# EAGLE board Keychain_Tape (EAGLE 9.5.2)
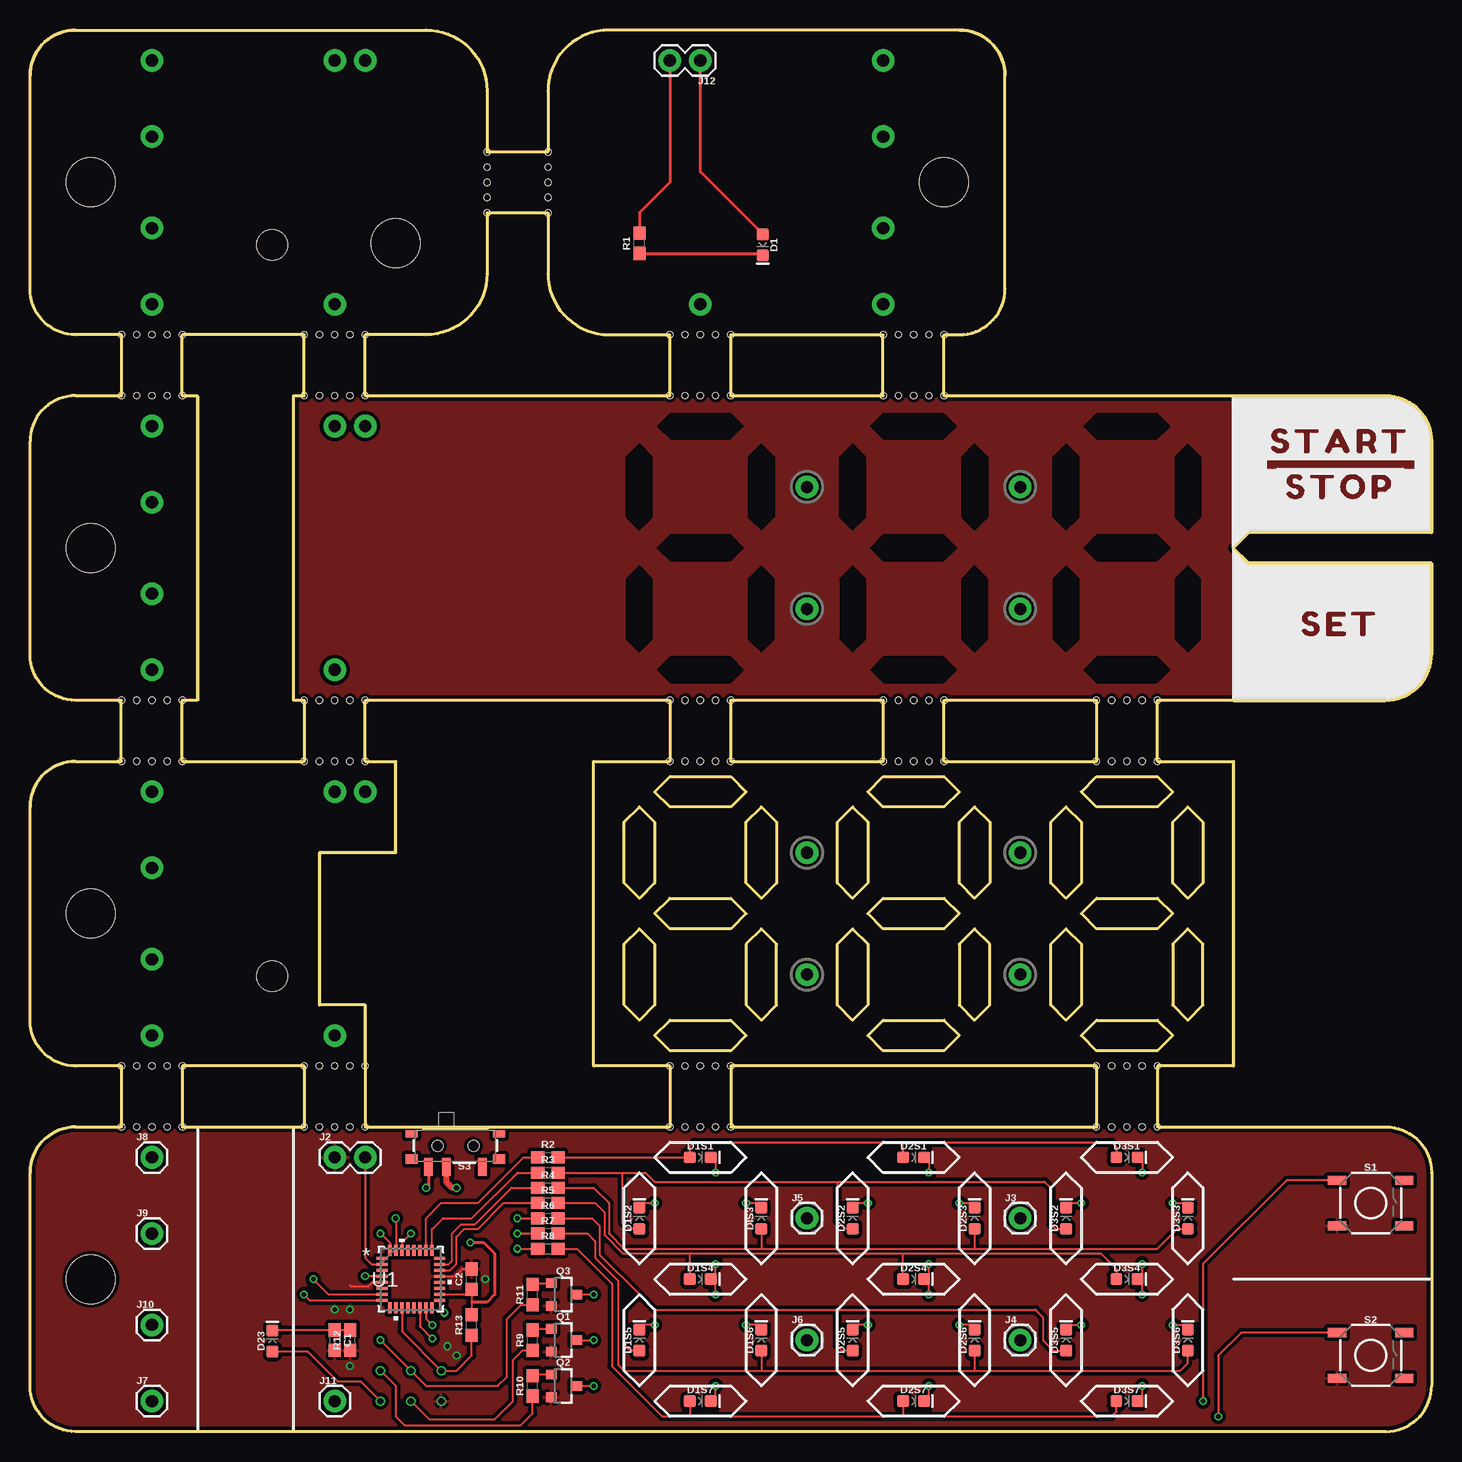
[diagram p0: board, top side]
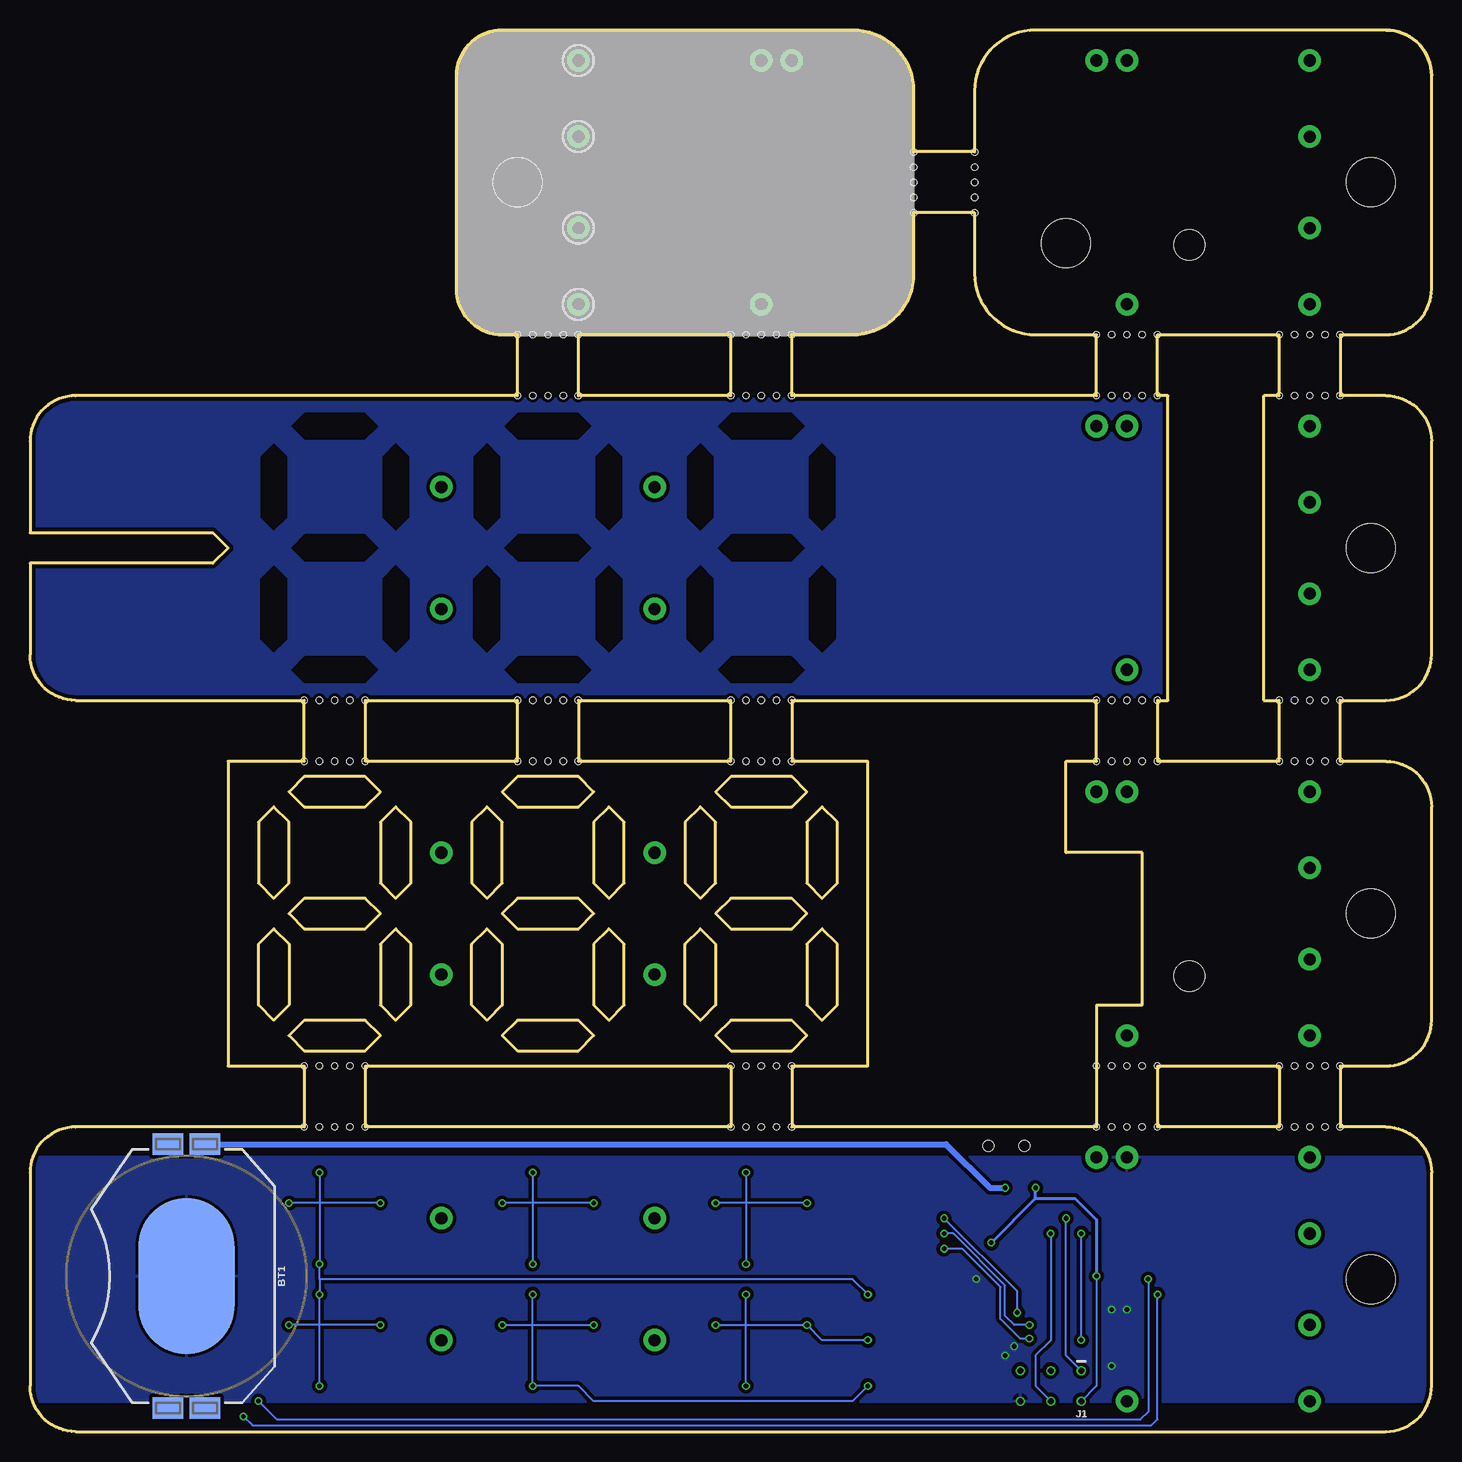
[diagram p1: board, bottom side, seen from below]

Size 116.84 x 116.84 mm. Coordinates in mm from the lower left corner, seen from the top.
Outline: 3.81,116.84 arc90 0,113.03
Outline: 3.81,91.44 arc-90 0,95.25
Outline: 0,113.03 arc-90 3.81,116.84
Outline: 3.81,116.84 33.02,116.84 arc-90 38.1,111.76 38.1,106.68 43.18,106.68 43.18,111.76 arc-90 48.26,116.84 77.47,116.84
Outline: 3.81,91.44 7.62,91.44 7.62,86.36 3.81,86.36 arc90 0,82.55 0,64.77 arc90 3.81,60.96 7.62,60.96 7.62,55.88 3.81,55.88 arc90 0,52.07 0,34.29 arc90 3.81,30.48 7.62,30.48 7.62,25.4 3.81,25.4 arc90 0,21.59 0,3.81 arc90 3.81,0 113.03,0 arc90 116.84,3.81 116.84,21.59 arc90 113.03,25.4 93.98,25.4 93.98,30.48 100.33,30.48 100.33,55.88 93.98,55.88 93.98,60.96 113.03,60.96 arc90 116.84,64.77 116.84,72.39 101.6,72.39 100.33,73.66 101.6,74.93 116.84,74.93 116.84,82.55 arc90 113.03,86.36 76.2,86.36 76.2,91.44 77.47,91.44
Outline: 3.81,91.44 arc-90 0,95.25
Outline: 0,95.25 0,113.03
Outline: 77.47,116.84 arc-90 81.28,113.03
Outline: 77.47,91.44 arc90 81.28,95.25
Outline: 81.28,113.03 arc90 77.47,116.84
Outline: 77.47,91.44 arc90 81.28,95.25
Outline: 81.28,95.25 81.28,113.03
Outline: 12.7,25.4 22.86,25.4 22.86,30.48 12.7,30.48 12.7,25.4
Outline: 27.94,25.4 53.34,25.4 53.34,30.48 46.99,30.48 46.99,55.88 53.34,55.88 53.34,60.96 27.94,60.96 27.94,55.88 30.48,55.88 30.48,48.26 24.13,48.26 24.13,35.56 27.94,35.56 27.94,25.4
Outline: 58.42,25.4 88.9,25.4 88.9,30.48 58.42,30.48 58.42,25.4
Outline: 12.7,55.88 22.86,55.88 22.86,60.96 21.97,60.96 21.97,86.36 22.86,86.36 22.86,91.44 12.7,91.44 12.7,86.36 13.97,86.36 13.97,60.96 12.7,60.96 12.7,55.88
Outline: 58.42,55.88 71.12,55.88 71.12,60.96 58.42,60.96 58.42,55.88
Outline: 76.2,55.88 88.9,55.88 88.9,60.96 76.2,60.96 76.2,55.88
Outline: 52.07,53.34 53.34,54.61 58.42,54.61 59.69,53.34 58.42,52.07 53.34,52.07 52.07,53.34
Outline: 50.8,52.07 52.07,50.8 52.07,45.72 50.8,44.45 49.53,45.72 49.53,50.8 50.8,52.07
Outline: 60.96,52.07 62.23,50.8 62.23,45.72 60.96,44.45 59.69,45.72 59.69,50.8 60.96,52.07
Outline: 52.07,43.18 53.34,44.45 58.42,44.45 59.69,43.18 58.42,41.91 53.34,41.91 52.07,43.18
Outline: 50.8,41.91 52.07,40.64 52.07,35.56 50.8,34.29 49.53,35.56 49.53,40.64 50.8,41.91
Outline: 60.96,41.91 59.69,40.64 59.69,35.56 60.96,34.29 62.23,35.56 62.23,40.64 60.96,41.91
Outline: 52.07,33.02 53.34,34.29 58.42,34.29 59.69,33.02 58.42,31.75 53.34,31.75 52.07,33.02
Outline: 69.85,53.34 71.12,54.61 76.2,54.61 77.47,53.34 76.2,52.07 71.12,52.07 69.85,53.34
Outline: 68.58,52.07 69.85,50.8 69.85,45.72 68.58,44.45 67.31,45.72 67.31,50.8 68.58,52.07
Outline: 78.74,52.07 80.01,50.8 80.01,45.72 78.74,44.45 77.47,45.72 77.47,50.8 78.74,52.07
Outline: 69.85,43.18 71.12,44.45 76.2,44.45 77.47,43.18 76.2,41.91 71.12,41.91 69.85,43.18
Outline: 68.58,41.91 69.85,40.64 69.85,35.56 68.58,34.29 67.31,35.56 67.31,40.64 68.58,41.91
Outline: 78.74,41.91 77.47,40.64 77.47,35.56 78.74,34.29 80.01,35.56 80.01,40.64 78.74,41.91
Outline: 69.85,33.02 71.12,34.29 76.2,34.29 77.47,33.02 76.2,31.75 71.12,31.75 69.85,33.02
Outline: 87.63,53.34 88.9,54.61 93.98,54.61 95.25,53.34 93.98,52.07 88.9,52.07 87.63,53.34
Outline: 86.36,52.07 87.63,50.8 87.63,45.72 86.36,44.45 85.09,45.72 85.09,50.8 86.36,52.07
Outline: 96.52,52.07 97.79,50.8 97.79,45.72 96.52,44.45 95.25,45.72 95.25,50.8 96.52,52.07
Outline: 87.63,43.18 88.9,44.45 93.98,44.45 95.25,43.18 93.98,41.91 88.9,41.91 87.63,43.18
Outline: 86.36,41.91 87.63,40.64 87.63,35.56 86.36,34.29 85.09,35.56 85.09,40.64 86.36,41.91
Outline: 96.52,41.91 95.25,40.64 95.25,35.56 96.52,34.29 97.79,35.56 97.79,40.64 96.52,41.91
Outline: 87.63,33.02 88.9,34.29 93.98,34.29 95.25,33.02 93.98,31.75 88.9,31.75 87.63,33.02
Outline: 27.94,86.36 53.34,86.36 53.34,91.44 48.26,91.44 arc-90 43.18,96.52 43.18,101.6 38.1,101.6 38.1,96.52 arc-90 33.02,91.44 27.94,91.44 27.94,86.36
Outline: 58.42,86.36 71.12,86.36 71.12,91.44 58.42,91.44 58.42,86.36
Copper layers (1*16): Top 0.035mm / dielectric 1.5mm / Bottom 0.035mm
Design rules "SparkFun-2-Layer-Minimum-JLCPCB": minimum track width 5mil, minimum drill 0.3mm, track to track 5mil, track to pad 5mil, pad to pad 5mil, via to via 5mil, smd to smd 5mil, copper to edge 7mil, drill to drill 7mil, minimum pad ring 5mil, minimum via ring 5mil, stop-mask expansion 4mil, vias tented up to drill 25mil, thermal gap 10mil
Holes 4.06 mm at 5.08,12.7 5.08,43.18 5.08,73.66 5.08,104.14 76.2,104.14 30.48,99.06
Holes 2.54 mm at 20.19,37.97 20.19,98.93
Holes 0.51 mm at 10.16,91.44 11.43,91.44 8.89,91.44 7.62,91.44 12.7,91.44 25.4,91.44 26.67,91.44 24.13,91.44 22.86,91.44 27.94,91.44 10.16,86.36 11.43,86.36 8.89,86.36 7.62,86.36 12.7,86.36 25.4,86.36 26.67,86.36 24.13,86.36 22.86,86.36 27.94,86.36 55.88,86.36 57.15,86.36 54.61,86.36 53.34,86.36 58.42,86.36 73.66,86.36 74.93,86.36 72.39,86.36 71.12,86.36 76.2,86.36 55.88,91.44 57.15,91.44 54.61,91.44 53.34,91.44 58.42,91.44 73.66,91.44 74.93,91.44 72.39,91.44 71.12,91.44 76.2,91.44 43.18,104.14 43.18,105.41 43.18,102.87 43.18,101.6 43.18,106.68 38.1,104.14 38.1,105.41 38.1,102.87 38.1,101.6 38.1,106.68 10.16,55.88 11.43,55.88 8.89,55.88 7.62,55.88 12.7,55.88 10.16,60.96 11.43,60.96 8.89,60.96 7.62,60.96 12.7,60.96 25.4,60.96 26.67,60.96 24.13,60.96 22.86,60.96 27.94,60.96 25.4,55.88 26.67,55.88 24.13,55.88 22.86,55.88 27.94,55.88 55.88,60.96 57.15,60.96 54.61,60.96 53.34,60.96 58.42,60.96 73.66,60.96 74.93,60.96 72.39,60.96 71.12,60.96 76.2,60.96 91.44,60.96 92.71,60.96 90.17,60.96 88.9,60.96 93.98,60.96 55.88,55.88 57.15,55.88 54.61,55.88 53.34,55.88 58.42,55.88 73.66,55.88 74.93,55.88 72.39,55.88 71.12,55.88 76.2,55.88 91.44,55.88 92.71,55.88 90.17,55.88 88.9,55.88 93.98,55.88 10.16,25.4 11.43,25.4 8.89,25.4 7.62,25.4 12.7,25.4 10.16,30.48 11.43,30.48 8.89,30.48 7.62,30.48 12.7,30.48 25.4,25.4 26.67,25.4 24.13,25.4 22.86,25.4 27.94,25.4 25.4,30.48 26.67,30.48 24.13,30.48 22.86,30.48 27.94,30.48 55.88,25.4 57.15,25.4 54.61,25.4 53.34,25.4 58.42,25.4 55.88,30.48 57.15,30.48 54.61,30.48 53.34,30.48 58.42,30.48 91.44,25.4 92.71,25.4 90.17,25.4 88.9,25.4 93.98,25.4 91.44,30.48 92.71,30.48 90.17,30.48 88.9,30.48 93.98,30.48

## Footprints (pad centres in the part's own frame; a part is rotated, then mirrored left to right if it is on the bottom)
BATTCON_20MM_4LEGS_OVERPASTE_INNER = smd 1.778 x 2.54: 1 -11,1.55; 3 11,1.55; P$1 -11,-1.55; P$2 11,-1.55 | smd 13 x 8: 2 0,0
0603 = smd 1.1 x 1: 1 -0.85,0; 2 0.85,0
LED-0603 = smd 1 x 1: A -0.877,0; C 0.877,0
2X3_TEST_POINTS = drill 0.508: 1 -2.54,-1.27; 2 -2.54,1.27; 3 0,-1.27; 4 0,1.27; 5 2.54,-1.27; 6 2.54,1.27
1X02 = drill 1.016 pad 1.88: 1 0,0; 2 2.54,0
1X01 = drill 1.016 pad 1.88: 1 0,0
SOT23-3 = smd 0.8 x 0.9: 1 -0.95,-1; 2 0.95,-1; 3 0,1.1
TACTILE_SWITCH_SMD_5.2MM = smd 1.524 x 0.762: 1 -2.794,1.905; 2 2.794,1.905; 3 -2.794,-1.905; 4 2.794,-1.905
SWITCH_SPST_SMD_A = smd 0.7 x 1.5: 1 -2.25,-1.75; 2 -0.75,-1.75; 3 2.25,-1.75 | smd 1 x 0.6: GND1 -3.65,1; GND3 3.65,1 | smd 1 x 0.8: GND2 -3.65,-1.1; GND4 3.65,-1.1 | hole 0.9: -1.5,0; 1.5,0
32M1-A_ATM = smd 0.914 x 0.254: 1 -2.4,1.75; 2 -2.4,1.25; 3 -2.4,0.75; 4 -2.4,0.25; 5 -2.4,-0.25; 6 -2.4,-0.75; 7 -2.4,-1.25; 8 -2.4,-1.75; 17 2.4,-1.75; 18 2.4,-1.25; 19 2.4,-0.75; 20 2.4,-0.25; 21 2.4,0.25; 22 2.4,0.75; 23 2.4,1.25; 24 2.4,1.75 | smd 0.254 x 0.914: 9 -1.75,-2.4; 10 -1.25,-2.4; 11 -0.75,-2.4; 12 -0.25,-2.4; 13 0.25,-2.4; 14 0.75,-2.4; 15 1.25,-2.4; 16 1.75,-2.4; 25 1.75,2.4; 26 1.25,2.4; 27 0.75,2.4; 28 0.25,2.4; 29 -0.25,2.4; 30 -0.75,2.4; 31 -1.25,2.4; 32 -1.75,2.4

## Placement (x,y rotation side)
BT1  [BATTCON_20MM_4LEGS_OVERPASTE_INNER]  103.79,12.96 270 bottom
C1  0.1uF  [0603]  25.4,7.62 270 top
C2  0.1uF  [0603]  36.83,12.7 90 top
D1  IR LED  [LED-0603]  61.09,98.93 270 top
D1S1  [LED-0603]  55.88,22.86 0 top
D1S2  [LED-0603]  50.8,17.78 90 top
D1S4  [LED-0603]  55.88,12.7 0 top
D1S5  [LED-0603]  50.8,7.62 90 top
D1S6  [LED-0603]  60.96,7.62 90 top
D1S7  [LED-0603]  55.88,2.54 0 top
D2S1  [LED-0603]  73.66,22.86 0 top
D2S2  [LED-0603]  68.58,17.78 90 top
D2S3  [LED-0603]  78.74,17.78 90 top
D2S4  [LED-0603]  73.66,12.7 0 top
D2S5  [LED-0603]  68.58,7.62 90 top
D2S6  [LED-0603]  78.74,7.62 90 top
D2S7  [LED-0603]  73.66,2.54 0 top
D3S1  [LED-0603]  91.44,22.86 0 top
D3S2  [LED-0603]  86.36,17.78 90 top
D3S3  [LED-0603]  96.52,17.78 90 top
D3S4  [LED-0603]  91.44,12.7 0 top
D3S5  [LED-0603]  86.36,7.62 90 top
D3S6  [LED-0603]  96.52,7.62 90 top
D3S7  [LED-0603]  91.44,2.54 0 top
D23  IR PHOTOTRANS  [LED-0603]  20.21,7.56 90 top
DIS3  [LED-0603]  60.96,17.78 90 top
FRAME1  FRAME-LETTER  [CREATIVE_COMMONS]  35.6,-12.17 0 top  (outside the outline)
J1  AVR_SPI_PROG_3X2TESTPOINTS  [2X3_TEST_POINTS]  31.75,3.81 180 bottom
J2  [1X02]  25.4,22.86 0 top
J3  [1X01]  82.55,17.78 0 top
J4  [1X01]  82.55,7.62 0 top
J5  [1X01]  64.77,17.78 0 top
J6  [1X01]  64.77,7.62 0 top
J7  [1X01]  10.16,2.54 0 top
J8  [1X01]  10.16,22.86 0 top
J9  [1X01]  10.16,16.51 0 top
J10  [1X01]  10.16,8.89 0 top
J11  [1X01]  25.4,2.54 0 top
J12  [1X02]  55.88,114.3 180 top
Q1  220mA/50V/3.5Ω  [SOT23-3]  44.45,7.62 270 top
Q2  220mA/50V/3.5Ω  [SOT23-3]  44.45,3.81 270 top
Q3  220mA/50V/3.5Ω  [SOT23-3]  44.45,11.43 270 top
R1  1k  [0603]  50.8,99.06 90 top
R2  33  [0603]  43.18,22.86 0 top
R3  33  [0603]  43.18,21.59 0 top
R4  33  [0603]  43.18,20.32 0 top
R5  33  [0603]  43.18,19.05 0 top
R6  33  [0603]  43.18,17.78 0 top
R7  33  [0603]  43.18,16.51 0 top
R8  33  [0603]  43.18,15.24 0 top
R9  1k  [0603]  41.91,7.62 90 top
R10  1k  [0603]  41.91,3.81 90 top
R11  1k  [0603]  41.91,11.43 90 top
R12  1k  [0603]  26.67,7.62 90 top
R13  1k  [0603]  36.83,8.89 90 top
S1  MOMENTARY-SWITCH-SPST-SMD-5.2MM-TALL  [TACTILE_SWITCH_SMD_5.2MM]  111.76,19.05 0 top
S2  MOMENTARY-SWITCH-SPST-SMD-5.2MM-TALL  [TACTILE_SWITCH_SMD_5.2MM]  111.76,6.35 0 top
S3  [SWITCH_SPST_SMD_A]  35.46,23.83 0 top
U1  ATTINY861V-10MU  [32M1-A_ATM]  31.75,12.7 0 top
U$1  [#START#0]  109.22,82.55 0 top
U$2  [#STOP#0]  109.22,78.74 0 top
U$3  [#SET#0]  109.22,67.31 0 top

## Library data of the parts
BT1 = SparkFun-Batteries
C1 C2 = SparkFun-Capacitors; PROD_ID: CAP-00810
D1 D23 = SparkFun-LED; PROD_ID: DIO-14125
D1S1 D1S2 D1S4-D1S7 D2S1-D2S7 D3S1-D3S7 DIS3 = SparkFun-LED
FRAME1 = SparkFun-Aesthetics
J1-J12 = SparkFun-Connectors
Q1-Q3 = SparkFun-DiscreteSemi; PROD_ID: TRANS-00830
R1 R9-R13 = SparkFun-Resistors; PROD_ID: RES-07856
R2-R8 = SparkFun-Resistors; PROD_ID: RES-08270
S1 S2 = SparkFun-Switches; PROD_ID: SWCH-14139
S3 = SparkFun-Switches; PROD_ID: SWCH-10651; SF_SKU: COM-10860
U1 = Melodica; COPYRIGHT: Copyright (C) 2021 Ultra Librarian. All rights reserved.; DIGI-KEY_PART_NUMBER_1: ATTINY861V-10MU-ND; DIGI-KEY_PART_NUMBER_2: 2156-ATTINY861V-10MU-ND; MANUFACTURER_PART_NUMBER: ATTINY861V-10MU; MFR_NAME: Microchip
U$1-U$3 = output

## Nets
0: R2.1 U1.26
1: R3.1 U1.25
2: R4.1 U1.23
3: R5.1 U1.22
4: R6.1 U1.17
5: R7.1 U1.15
6: R8.1 U1.14
7: U1.13
8/COPI: J1.4 R9.1 U1.30
9/CIPO: J1.1 R10.1 U1.31
10/SCK: J1.3 R11.1 U1.32
11: J2.2 U1.2
12: S1.1 U1.7
13: S2.1 U1.8
14: U1.10
!RESET: J1.5 R13.1 U1.11
GND: BT1.2 C1.2 C2.2 J1.6 J2.1 Q1.2 Q2.2 Q3.2 R12.1 S1.3 S2.3 U1.5 U1.21
IR_DETECTOR: C1.1 D23.C R12.2
N$4: D1S1.C D1S2.C D1S4.C D1S5.C D1S6.C D1S7.C DIS3.C Q1.3
N$6: BT1.1 S3.2
N$8: Q2.1 R10.2
N$9: Q1.1 R9.2
N$11: D2S1.C D2S2.C D2S3.C D2S4.C D2S5.C D2S6.C D2S7.C Q2.3
N$13: Q3.1 R11.2
N$14: D3S1.C D3S2.C D3S3.C D3S4.C D3S5.C D3S6.C D3S7.C Q3.3
N$44: J12.2 R1.2
N$45: D1.C R1.1
N$46: D1.A J12.1
SEG1: D1S1.A D2S1.A D3S1.A R2.2
SEG2: D1S2.A D2S2.A D3S2.A R3.2
SEG3: D2S3.A D3S3.A DIS3.A R4.2
SEG4: D1S4.A D2S4.A D3S4.A R5.2
SEG5: D1S5.A D2S5.A D3S5.A R6.2
SEG6: D1S6.A D2S6.A D3S6.A R7.2
SEG7: D1S7.A D2S7.A D3S7.A R8.2
V_BATT: C2.1 D23.A J1.2 R13.2 S3.1 U1.4 U1.18

## Tracks (layer width: path | path; a pad name or v marks a point on that pad's centre or on a via)
0
  Top 0.152: U1.26 33,17.76 34.29,19.05 37.34,19.05 41.15,22.86 R2.1
1
  Top 0.152: U1.25 33.5,16.86 34.42,17.78 36.83,17.78 40.64,21.59 R3.1
2
  Top 0.152: U1.23 34.91,13.95 35.18,14.22 35.18,16.51 35.94,17.27 37.08,17.27 40.13,20.32 R4.1
3
  Top 0.152: U1.22 35.04,13.45 35.56,13.97 35.56,16.26 36.2,16.89 37.34,16.89 39.5,19.05 R5.1
4  (via drill 0.38)
  Top 0.152: U1.17 34.15,10.3 v34.54,9.91 | v40.64,17.78 R6.1
  Bottom 0.152: v34.54,9.91 34.54,11.68 v40.64,17.78
5  (via drill 0.38)
  Top 0.152: U1.15 33,9.42 v33.53,8.89 | v40.64,16.51 R7.1
  Bottom 0.152: v33.53,8.89 34.8,8.89 35.56,9.65 35.56,12.19 39.88,16.51 v40.64,16.51
6  (via drill 0.38)
  Top 0.152: U1.14 32.5,8.9 32.51,8.89 32.51,8.76 v33.53,7.75 | v40.64,15.24 R8.1
  Bottom 0.152: v33.53,7.75 34.29,7.75 35.94,9.4 35.94,12.07 39.12,15.24 v40.64,15.24
8/COPI  (via drill 0.38)
  Top 0.152: v31.75,16.51 31,15.76 U1.30 | R9.1 41.06,6.77 40.26,5.97 40.26,2.54 38.73,1.02 33.27,1.02 J1.4
  Bottom 0.152: v31.75,16.51 31.75,7.62 33.02,6.35 33.02,3.81 J1.4
9/CIPO  (via drill 0.38)
  Top 0.152: v30.48,17.78 30.5,17.76 U1.31 | J1.1 30.48,3.81 30.48,1.27 31.24,0.51 40.89,0.51 41.91,1.52 R10.1
  Bottom 0.152: J1.1 30.48,6.35 v30.48,17.78
10/SCK  (via drill 0.38)
  Top 0.152: v29.21,7.62 J1.3 33.02,3.81 38.99,3.81 39.75,4.57 39.75,9.4 40.93,10.58 R11.1 | v29.21,16.51 30,15.72 U1.32
  Bottom 0.152: v29.21,7.62 v29.21,16.51
11
  Top 0.152: J2.2 27.94,14.48 28.47,13.95 U1.2
12  (via drill 0.38)
  Top 0.152: S1.1 104.78,20.95 97.79,13.97 v97.79,2.54 | v23.62,12.7 24.87,11.45 U1.7
  Bottom 0.152: v97.79,2.54 96.27,1.02 24.26,1.02 23.62,1.65 v23.62,12.7
13  (via drill 0.38)
  Top 0.152: S2.1 100.97,8.25 99.06,6.35 v99.06,1.27 | v22.85,11.43 23.33,10.95 U1.8
  Bottom 0.152: v99.06,1.27 98.3,0.51 23.37,0.51 22.86,1.02 v22.86,11.43 v22.85,11.43
!RESET
  Top 0.152: R13.1 36.83,6.35 35.56,5.08 J1.5 31,8.37 U1.11
GND  (via drill 0.38)
  Top 0.152: U1.21 34.92,12.95 | 34.93,12.95 34.92,12.95 | U1.5 28.58,12.45 28.19,12.07 26.8,12.07 26.67,12.19 | 34.92,12.95 35.43,12.95 36.07,13.59 36.79,13.59 C2.2
  other vias: 25.4,10.16 26.67,10.16 26.67,5.46 37.97,12.7 34.8,7.11 35.56,6.35
  pour Top (isolate 0.305): 0,25.4 116.84,25.4 116.84,0 0,0
  pour Bottom (isolate 0.305): 0,22.86 116.84,22.86 116.84,2.54 0,2.54
  pour Top (isolate 0.305): 21.97,73.66 52.07,73.66 49.53,76.2 49.53,81.28 53.34,85.09 58.42,85.09 62.23,81.28 62.23,76.2 59.69,73.66 69.85,73.66 67.31,76.2 67.31,81.28 71.12,85.09 76.2,85.09 80.01,81.28 80.01,76.2 77.47,73.66 87.63,73.66 85.09,76.2 85.09,81.28 88.9,85.09 93.98,85.09 97.79,81.28 97.79,76.2 95.25,73.66 100.33,73.66 101.6,74.93 116.84,74.93 116.84,82.55 arc90 113.03,86.36 21.97,86.36
  pour Top (isolate 0.305): 21.97,73.66 52.07,73.66 49.53,71.12 49.53,66.04 53.34,62.23 58.42,62.23 62.23,66.04 62.23,71.12 59.69,73.66 69.85,73.66 67.31,71.12 67.31,66.04 71.12,62.23 76.2,62.23 80.01,66.04 80.01,71.12 77.47,73.66 87.63,73.66 85.09,71.12 85.09,66.04 88.9,62.23 93.98,62.23 97.79,66.04 97.79,71.12 95.25,73.66 100.33,73.66 101.6,72.39 116.84,72.39 116.84,64.77 arc-90 113.03,60.96 21.97,60.96
GND1
  pour Top (isolate 0.305): 50.8,72.39 52.07,73.66 53.34,72.39 58.42,72.39 59.69,73.66 60.96,72.39 59.69,71.12 59.69,66.04 60.96,64.77 59.69,63.5 58.42,64.77 53.34,64.77 52.07,63.5 50.8,64.77 52.07,66.04 52.07,71.12
GND2
  pour Top (isolate 0.305): 68.58,82.55 69.85,83.82 71.12,82.55 76.2,82.55 77.47,83.82 78.74,82.55 77.47,81.28 77.47,76.2 78.74,74.93 77.47,73.66 76.2,74.93 71.12,74.93 69.85,73.66 68.58,74.93 69.85,76.2 69.85,81.28
GND3
  pour Top (isolate 0.305): 68.58,72.39 69.85,73.66 71.12,72.39 76.2,72.39 77.47,73.66 78.74,72.39 77.47,71.12 77.47,66.04 78.74,64.77 77.47,63.5 76.2,64.77 71.12,64.77 69.85,63.5 68.58,64.77 69.85,66.04 69.85,71.12
GND4
  pour Top (isolate 0.305): 86.36,82.55 87.63,83.82 88.9,82.55 93.98,82.55 95.25,83.82 96.52,82.55 95.25,81.28 95.25,76.2 96.52,74.93 95.25,73.66 93.98,74.93 88.9,74.93 87.63,73.66 86.36,74.93 87.63,76.2 87.63,81.28
GND5
  pour Top (isolate 0.305): 86.36,72.39 87.63,73.66 88.9,72.39 93.98,72.39 95.25,73.66 96.52,72.39 95.25,71.12 95.25,66.04 96.52,64.77 95.25,63.5 93.98,64.77 88.9,64.77 87.63,63.5 86.36,64.77 87.63,66.04 87.63,71.12
GND6
  pour Top (isolate 0.305): 50.8,82.55 52.07,83.82 53.34,82.55 58.42,82.55 59.69,83.82 60.96,82.55 59.69,81.28 59.69,76.2 60.96,74.93 59.69,73.66 58.42,74.93 53.34,74.93 52.07,73.66 50.8,74.93 52.07,76.2 52.07,81.28
GND7
  pour Bottom (isolate 0.305): 21.97,73.66 52.07,73.66 49.53,71.12 49.53,66.04 53.34,62.23 58.42,62.23 62.23,66.04 62.23,71.12 59.69,73.66 69.85,73.66 67.31,71.12 67.31,66.04 71.12,62.23 76.2,62.23 80.01,66.04 80.01,71.12 77.47,73.66 87.63,73.66 85.09,71.12 85.09,66.04 88.9,62.23 93.98,62.23 97.79,66.04 97.79,71.12 95.25,73.66 100.33,73.66 101.6,72.39 116.84,72.39 116.84,64.77 arc-90 113.03,60.96 21.97,60.96
  pour Bottom (isolate 0.305): 21.97,73.66 52.07,73.66 49.53,76.2 49.53,81.28 53.34,85.09 58.42,85.09 62.23,81.28 62.23,76.2 59.69,73.66 69.85,73.66 67.31,76.2 67.31,81.28 71.12,85.09 76.2,85.09 80.01,81.28 80.01,76.2 77.47,73.66 87.63,73.66 85.09,76.2 85.09,81.28 88.9,85.09 93.98,85.09 97.79,81.28 97.79,76.2 95.25,73.66 100.33,73.66 101.6,74.93 116.84,74.93 116.84,82.55 arc90 113.03,86.36 21.97,86.36
GND8
  pour Bottom (isolate 0.305): 50.8,74.93 52.07,73.66 53.34,74.93 58.42,74.93 59.69,73.66 60.96,74.93 59.69,76.2 59.69,81.28 60.96,82.55 59.69,83.82 58.42,82.55 53.34,82.55 52.07,83.82 50.8,82.55 52.07,81.28 52.07,76.2
GND9
  pour Bottom (isolate 0.305): 68.58,64.77 69.85,63.5 71.12,64.77 76.2,64.77 77.47,63.5 78.74,64.77 77.47,66.04 77.47,71.12 78.74,72.39 77.47,73.66 76.2,72.39 71.12,72.39 69.85,73.66 68.58,72.39 69.85,71.12 69.85,66.04
GND10
  pour Bottom (isolate 0.305): 68.58,74.93 69.85,73.66 71.12,74.93 76.2,74.93 77.47,73.66 78.74,74.93 77.47,76.2 77.47,81.28 78.74,82.55 77.47,83.82 76.2,82.55 71.12,82.55 69.85,83.82 68.58,82.55 69.85,81.28 69.85,76.2
GND11
  pour Bottom (isolate 0.305): 86.36,64.77 87.63,63.5 88.9,64.77 93.98,64.77 95.25,63.5 96.52,64.77 95.25,66.04 95.25,71.12 96.52,72.39 95.25,73.66 93.98,72.39 88.9,72.39 87.63,73.66 86.36,72.39 87.63,71.12 87.63,66.04
GND12
  pour Bottom (isolate 0.305): 86.36,74.93 87.63,73.66 88.9,74.93 93.98,74.93 95.25,73.66 96.52,74.93 95.25,76.2 95.25,81.28 96.52,82.55 95.25,83.82 93.98,82.55 88.9,82.55 87.63,83.82 86.36,82.55 87.63,81.28 87.63,76.2
GND13
  pour Bottom (isolate 0.305): 50.8,64.77 52.07,63.5 53.34,64.77 58.42,64.77 59.69,63.5 60.96,64.77 59.69,66.04 59.69,71.12 60.96,72.39 59.69,73.66 58.42,72.39 53.34,72.39 52.07,73.66 50.8,72.39 52.07,71.12 52.07,66.04
IR_DETECTOR
  Top 0.152: D23.C 20.24,8.47 22.86,8.47 C1.1 R12.2
N$1  (via drill 1.02 pad 1.88)
  other vias: 25.4,33.02
N$2  (via drill 1.02 pad 1.88)
  other vias: 27.94,53.34
N$3  (via drill 1.02 pad 1.88)
  other vias: 25.4,53.34
N$4  (via drill 0.38)
  Top 0.152: D1S1.C 57.15,22.86 v57.15,21.59 | v57.15,11.43 57.15,12.7 D1S4.C 57.15,13.09 v57.15,13.97 | D1S7.C 57.15,2.54 v57.15,3.81 | D1S2.C 50.8,19.05 v52.07,19.05 | v59.69,19.05 60.96,19.05 DIS3.C | D1S6.C 60.96,8.89 v59.69,8.89 | v52.07,8.89 50.8,8.89 D1S5.C | Q1.3 v46.99,7.62
  Bottom 0.152: v57.15,21.59 57.15,19.05 | 57.15,19.05 v57.15,13.97 | v57.15,3.81 57.15,8.89 | 57.15,8.89 v57.15,11.43 | v52.07,19.05 57.15,19.05 | 57.15,19.05 v59.69,19.05 | v59.69,8.89 57.15,8.89 | 57.15,8.89 v52.07,8.89 50.8,7.62 v46.99,7.62
N$5  (via drill 1.02 pad 1.88)
  other vias: 10.16,33.02
N$6  (via drill 0.38)
  Top 0.508: v35.56,20.32 35.18,20.32 34.71,20.79 S3.2
  Bottom 0.508: BT1.1 40.47,23.96 36.83,20.32 v35.56,20.32
N$7  (via drill 1.02 pad 1.88)
  other vias: 10.16,53.34
N$8
  Top 0.152: R10.2 42.01,4.76 Q2.1
N$9
  Top 0.152: R9.2 42.01,8.57 Q1.1
N$10  (via drill 1.02 pad 1.88)
  other vias: 10.16,46.99
N$11  (via drill 0.38)
  Top 0.152: D2S1.C 74.93,22.86 v74.93,21.59 | v74.93,11.43 74.93,12.7 D2S4.C 74.93,13.09 v74.93,13.97 | D2S7.C 74.93,2.54 v74.93,3.81 | D2S6.C 78.74,8.89 v77.47,8.89 | v69.85,8.89 68.58,8.89 D2S5.C | D2S2.C 68.58,19.05 v69.85,19.05 | v77.47,19.05 78.74,19.05 D2S3.C | Q2.3 v46.99,3.81
  Bottom 0.152: v74.93,21.59 74.93,19.05 | 74.93,19.05 v74.93,13.97 | 74.93,8.89 v74.93,3.81 71.12,3.81 69.85,2.54 48.26,2.54 v46.99,3.81 | 74.93,8.89 v74.93,11.43 | 74.93,8.89 v69.85,8.89 | v69.85,19.05 74.93,19.05 | 74.93,19.05 v77.47,19.05 | v77.47,8.89 74.93,8.89
N$12  (via drill 1.02 pad 1.88)
  other vias: 10.16,39.37
N$13
  Top 0.152: R11.2 42.01,12.38 Q3.1
N$14  (via drill 0.38)
  Top 0.152: D3S1.C 92.71,22.86 v92.71,21.59 | v92.71,11.43 92.71,12.7 D3S4.C 92.71,13.09 v92.71,13.97 | D3S7.C 92.71,2.54 v92.71,3.81 | D3S5.C 86.36,8.89 v87.63,8.89 | v95.25,8.89 96.52,8.89 D3S6.C | D3S2.C 86.36,19.05 v87.63,19.05 | v95.25,19.05 96.52,19.05 D3S3.C | Q3.3 v46.99,11.43
  Bottom 0.152: v92.71,21.59 92.71,19.05 | 92.71,19.05 v92.71,13.97 92.71,12.7 | v92.71,3.81 92.71,8.89 | 92.71,8.89 v92.71,11.43 92.71,12.7 | v87.63,8.89 92.71,8.89 | 92.71,8.89 v95.25,8.89 | v87.63,19.05 92.71,19.05 | 92.71,19.05 v95.25,19.05 | v46.99,11.43 48.26,12.7 92.71,12.7
N$15  (via drill 1.02 pad 1.88)
  other vias: 82.55,38.1
N$16  (via drill 1.02 pad 1.88)
  other vias: 82.55,48.26
N$17  (via drill 1.02 pad 1.88)
  other vias: 64.77,48.26
N$18  (via drill 1.02 pad 1.88)
  other vias: 64.77,38.1
N$19  (via drill 1.02 pad 1.88)
  other vias: 10.16,63.5
N$20  (via drill 1.02 pad 1.88)
  other vias: 10.16,83.82
N$21  (via drill 1.02 pad 1.88)
  other vias: 10.16,77.47
N$22  (via drill 1.02 pad 1.88)
  other vias: 10.16,69.85
N$23  (via drill 1.02 pad 1.88)
  other vias: 27.94,83.82
N$24  (via drill 1.02 pad 1.88)
  other vias: 25.4,83.82
N$25  (via drill 1.02 pad 1.88)
  other vias: 25.4,63.5
N$26  (via drill 1.02 pad 1.88)
  other vias: 82.55,68.58
N$27  (via drill 1.02 pad 1.88)
  other vias: 82.55,78.74
N$28  (via drill 1.02 pad 1.88)
  other vias: 64.77,78.74
N$29  (via drill 1.02 pad 1.88)
  other vias: 64.77,68.58
N$30  (via drill 1.02 pad 1.88)
  other vias: 10.16,93.98
N$31  (via drill 1.02 pad 1.88)
  other vias: 10.16,114.3
N$32  (via drill 1.02 pad 1.88)
  other vias: 10.16,107.95
N$33  (via drill 1.02 pad 1.88)
  other vias: 10.16,100.33
N$34  (via drill 1.02 pad 1.88)
  other vias: 27.94,114.3
N$35  (via drill 1.02 pad 1.88)
  other vias: 25.4,114.3
N$36  (via drill 1.02 pad 1.88)
  other vias: 25.4,93.98
N$37  (via drill 1.02 pad 1.88)
  other vias: 71.12,93.98
N$38  (via drill 1.02 pad 1.88)
  other vias: 71.12,114.3
N$39  (via drill 1.02 pad 1.88)
  other vias: 71.12,107.95
N$40  (via drill 1.02 pad 1.88)
  other vias: 71.12,100.33
N$43  (via drill 1.02 pad 1.88)
  other vias: 55.88,93.98
N$44
  Top 0.254: J12.2 53.34,104.14 50.8,101.6 R1.2
N$45
  Top 0.254: R1.1 60.93,98.21 D1.C
N$46
  Top 0.254: D1.A 55.88,105.02 J12.1
SEG1
  Top 0.152: R2.2 D1S1.A 55,23.76 55.37,24.13 72.77,24.13 | 72.77,24.13 90.17,24.13 90.56,23.74 D3S1.A | D2S1.A 72.78,24.12 72.77,24.13
SEG2
  Top 0.152: R3.2 49.4,21.59 | 49.4,21.59 51.31,21.59 52.07,20.83 67.44,20.83 | 67.44,20.83 84.58,20.83 85.09,20.32 85.09,17.27 85.47,16.89 86.35,16.89 D3S2.A | D1S2.A 49.9,16.9 49.4,17.4 49.4,21.59 | D2S2.A 67.93,16.9 67.31,17.53 67.31,20.7 67.44,20.83
SEG3
  Top 0.152: R4.2 46.99,20.32 48.26,19.05 48.26,16.51 49.53,15.24 60.96,15.24 | 60.96,15.24 78.74,15.24 | 78.74,15.24 93.98,15.24 95.64,16.9 D3S3.A | DIS3.A 60.96,15.24 | D2S3.A 78.74,15.24
SEG4
  Top 0.152: 54.99,14.86 49.4,14.86 47.88,16.38 47.88,18.29 47.12,19.05 R5.2 | 54.99,14.86 72.77,14.86 | 72.77,14.86 89.28,14.86 90.56,13.58 D3S4.A | D2S4.A 72.78,14.85 72.77,14.86 | D1S4.A 55,14.85 54.99,14.86
SEG5
  Top 0.152: R6.2 46.86,17.78 47.5,17.14 47.5,14.73 50.8,11.43 | 67.31,10.16 52.07,10.16 50.8,11.43 | 67.31,10.16 83.82,10.16 84.46,9.53 84.46,7.62 85.33,6.74 D3S5.A | D2S5.A 67.68,6.74 67.31,7.11 67.31,10.16 | D1S5.A 50.03,6.74 49.53,7.24 49.53,10.16 50.8,11.43
SEG6
  Top 0.152: R7.2 46.48,16.51 47.12,15.88 47.12,14.48 49.02,12.57 49.02,5.59 49.53,5.08 60.96,5.08 | 60.96,5.08 78.74,5.08 | 78.74,5.08 95.89,5.08 96.52,5.71 D3S6.A | D2S6.A 78.74,5.08 | D1S6.A 60.96,5.08
SEG7
  Top 0.152: R8.2 45.59,15.24 48.51,12.32 48.51,5.46 52.7,1.27 54.99,1.27 | 54.99,1.27 72.77,1.27 | 72.77,1.27 90.17,1.27 90.56,1.66 D3S7.A | D2S7.A 72.78,1.28 72.77,1.27 | D1S7.A 55,1.28 54.99,1.27
V_BATT  (via drill 0.38)
  Top 0.152: U1.18 36.43,11.45 C2.1 36.83,10.8 R13.2 | U1.4 v27.94,12.95 | J1.2 27.56,4.19 25.65,4.19 23.16,6.68 D23.A
  Top 0.254: S3.1 33.21,20.51 v33.02,20.32 | v36.7,15.75 37.85,15.75 38.73,14.86 38.73,11.43 38.1,10.8 36.83,10.8
  Bottom 0.152: v27.94,12.95 27.94,12.7 27.94,3.81 J1.2
  Bottom 0.254: 33.02,19.43 29.72,19.43 27.94,17.65 27.94,12.7 | v36.7,15.75 33.02,19.43 | 33.02,19.43 v33.02,20.32